# EAGLE board ecnoder_TCUT1350_v11 (EAGLE 9.7.0)
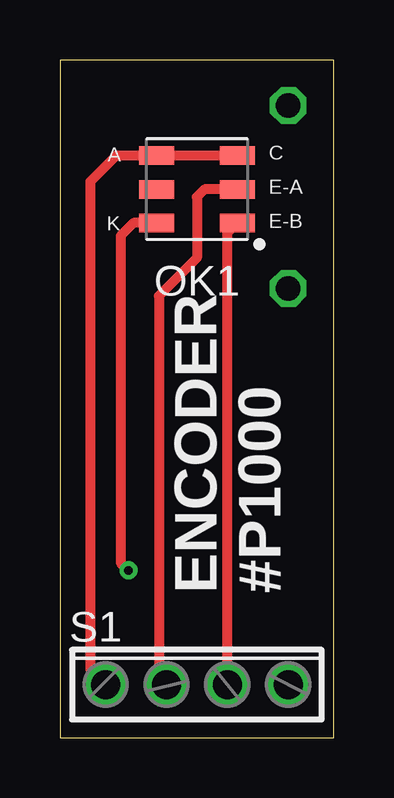
[diagram p0: board, top side]
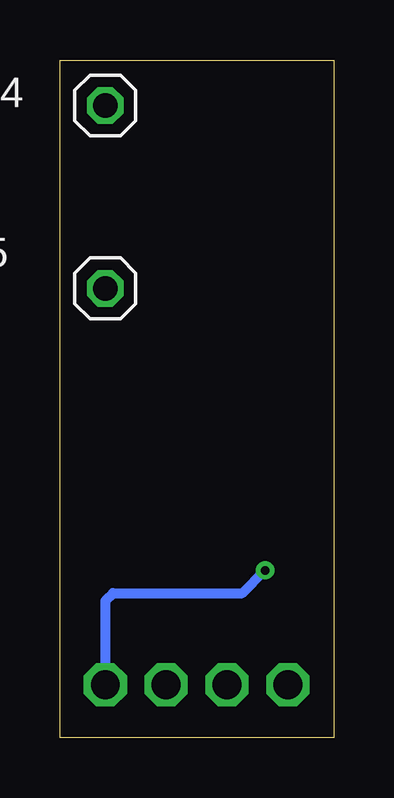
[diagram p1: board, bottom side, seen from below]

Size 11.42 x 28.25 mm. Coordinates in mm from the lower left corner, seen from the top.
Outline: 0,28.25 0,0 11.42,0 11.42,28.25 0,28.25
Copper layers (1*16): Top / Bottom
Stack-up Default Layer Stack: Top User Defined 0.035mm / Dielectric-1 User Defined 1.5mm / Bottom User Defined 0.035mm
Design rules "default *": minimum track width 6mil, minimum drill 0.35mm, track to track 6mil, track to pad 6mil, pad to pad 6mil, via to via 6mil, smd to smd 6mil, copper to edge 40mil, drill to drill 6mil, minimum pad ring 10mil, minimum via ring 8mil, stop-mask expansion 4mil, vias tented up to drill 0mil, thermal gap 10mil

## Footprints (pad centres in the part's own frame; a part is rotated, then mirrored left to right if it is on the bottom)
TCUT1350X01 = smd 1.462 x 0.774: A 1.685,-1.4; C -1.685,-1.4; E-A -1.685,0; E-B -1.685,1.4; K 1.685,1.4; N.C. 1.685,0
1X01 = drill 1.016 octagon: 1 0,0
4POL254 = drill 1.2 octagon: 1 -3.81,0; 2 -1.27,0; 3 1.27,0; 4 3.81,0

## Placement (x,y rotation side)
OK1  TCUT1350X01  [TCUT1350X01]  5.71,22.86 180 top
PIN4  PINHD-1X1  [1X01]  9.53,26.35 0 bottom
PIN5  PINHD-1X1  [1X01]  9.53,18.73 0 bottom
S1  [4POL254]  5.71,2.22 0 top

## Library data of the parts
OK1 = opto-vishay
PIN4 PIN5 = Connector; CATEGORY: CONNECTOR; SUB-CATEGORY: PIN-HEADER
S1 = con-phoenix-254-custom; OC_FARNELL: unknown; OC_NEWARK: unknown

## Nets
+5V: OK1.A OK1.C S1.1
LED1: OK1.K S1.4
N$1: OK1.E-B S1.3
N$2: OK1.E-A S1.2

## Tracks (layer width: path | path; a pad name or v marks a point on that pad's centre or on a via)
+5V
  Top 0.406: OK1.C OK1.A 2.35,24.26 1.27,23.18 1.27,2.86 S1.1
LED1  (via drill 0.35)
  Top 0.406: OK1.K 3.08,21.46 2.54,20.92 2.54,7.3 v2.86,6.99
  Bottom 0.406: v2.86,6.99 3.81,6.03 9.21,6.03 9.53,5.71 S1.4
N$1
  Top 0.406: S1.3 6.99,21.05 OK1.E-B
N$2
  Top 0.406: OK1.E-A 6.03,22.86 5.71,22.54 5.71,20 4.13,18.42 4.13,2.54 S1.2

## Text on the board
tPlace: A | C | E-A | E-B | K | ENCODER / #P1000